# EAGLE board CT_schematic (EAGLE 7.6.0)

Size 100 x 80 mm. Coordinates in mm from the lower left corner, seen from the top.
Outline: 0,0 100,0 100,80 0,80 0,0
Copper layers (1*16): Top 0.035mm / dielectric 1.5mm / Bottom 0.035mm
Design rules "default": minimum track width 10mil, minimum drill 24mil, track to track 8mil, track to pad 8mil, pad to pad 8mil, via to via 8mil, smd to smd 8mil, copper to edge 40mil, drill to drill 8mil, minimum pad ring 10mil, minimum via ring 8mil, stop-mask expansion 4mil, vias tented up to drill 0mil, thermal gap 10mil

## Footprints (pad centres in the part's own frame; a part is rotated, then mirrored left to right if it is on the bottom)
C0603 = smd 0.8 x 0.8: 1 -0.762,0; 2 0.762,0
C0402 = smd 0.5 x 0.5: 1 -0.508,0; 2 0.508,0
C0805 = smd 1.2 x 1.3: 1 -1.016,0; 2 1.016,0
C1206 = smd 1.3 x 1.6: 1 -1.524,0; 2 1.524,0
C1210 = smd 1.2 x 2.5: 1 -1.524,0; 2 1.524,0
EXV-9H = smd 3.505 x 1.676: 1 -2.857,0; 2 2.857,0
L0603 = smd 0.8 x 0.8: 1 -0.762,0; 2 0.762,0
PJ-037B_PACKAGE = drill 3.7 square: 1 12,0 | drill 3.2 square: 2 6,0
R0603 = smd 0.8 x 0.8: 1 -0.762,0; 2 0.762,0
UFQFPN48 = smd 0.559 x 0.305: 1 -3.375,2.751; 2 -3.375,2.251; 3 -3.375,1.75; 4 -3.375,1.25; 5 -3.375,0.75; 6 -3.375,0.25; 7 -3.375,-0.25; 8 -3.375,-0.75; 9 -3.375,-1.25; 10 -3.375,-1.75; 11 -3.375,-2.251; 12 -3.375,-2.751; 25 3.375,-2.751; 26 3.375,-2.251; 27 3.375,-1.75; 28 3.375,-1.25; 29 3.375,-0.75; 30 3.375,-0.25; 31 3.375,0.25; 32 3.375,0.75; 33 3.375,1.25; 34 3.375,1.75; 35 3.375,2.251; 36 3.375,2.751 | smd 0.305 x 0.559: 13 -2.751,-3.375; 14 -2.251,-3.375; 15 -1.75,-3.375; 16 -1.25,-3.375; 17 -0.75,-3.375; 18 -0.25,-3.375; 19 0.25,-3.375; 20 0.75,-3.375; 21 1.25,-3.375; 22 1.75,-3.375; 23 2.251,-3.375; 24 2.751,-3.375; 37 2.751,3.375; 38 2.251,3.375; 39 1.75,3.375; 40 1.25,3.375; 41 0.75,3.375; 42 0.25,3.375; 43 -0.25,3.375; 44 -0.75,3.375; 45 -1.25,3.375; 46 -1.75,3.375; 47 -2.251,3.375; 48 -2.751,3.375 | smd 5.588 x 5.588: 49 0,0
SOIC-8 = smd 1.6 x 0.6: 1 -2.7,1.905 | smd 1.55 x 0.6: 2 -2.7,0.635; 3 -2.7,-0.635; 4 -2.7,-1.905; 5 2.7,-1.905; 6 2.7,-0.635; 7 2.7,0.635; 8 2.7,1.905
SSOP-28 = smd 1.5 x 0.4: 1 -3.625,4.225; 2 -3.625,3.575; 3 -3.625,2.925; 4 -3.625,2.275; 5 -3.625,1.625; 6 -3.625,0.975; 7 -3.625,0.325; 8 -3.625,-0.325; 9 -3.625,-0.975; 10 -3.625,-1.625; 11 -3.625,-2.275; 12 -3.625,-2.925; 13 -3.625,-3.575; 14 -3.625,-4.225; 15 3.625,-4.225; 16 3.625,-3.575; 17 3.625,-2.925; 18 3.625,-2.275; 19 3.625,-1.625; 20 3.625,-0.975; 21 3.625,-0.325; 22 3.625,0.325; 23 3.625,0.975; 24 3.625,1.625; 25 3.625,2.275; 26 3.625,2.925; 27 3.625,3.575; 28 3.625,4.225
FCI_10118193-0001LF = smd 0.4 x 1.35: 1 -1.3,2.675; 2 -0.65,2.675; 3 0,2.675; 4 0.65,2.675; 5 1.3,2.675 | smd 1.6 x 1.4: 6 -3.2,2.45; 7 3.2,2.45 | smd 1.9 x 1.9: 8 -1.2,0; 9 1.2,0 | hole 0.5: -3.3,0; 3.3,0
TDFN-8/6MM = smd 0.3 x 0.75: 1 0,0; 2 0.5,0; 3 1,0; 4 1.5,0; 5 1.5,3; 6 1,3; 7 0.5,3; 8 0,3
ABLS-12.000MHZ-B4-T = smd 5.6 x 2.8: 1 0,0; 2 9.5,0
ASEK = smd 1.4 x 1: 1 -1.1,-0.8; 2 1.1,-0.8; 3 1.1,0.8; 4 -1.1,0.8
ASFL1 = smd 1.7 x 1.5: 1 -1.27,-1.1; 2 1.27,-1.1; 3 1.27,1.1; 4 -1.27,1.1
WSON-8 = smd 0.3 x 0.6: 1 -0.75,0; 2 0.05,0; 3 0.85,0; 4 1.65,0; 5 1.65,3.8; 6 0.85,3.8; 7 0.05,3.8; 8 -0.75,3.8 | smd 3 x 2.6: PAD 0.45,1.9
SON-6 = smd 0.55 x 0.3: 1 -0.355,0.5 | smd 0.52 x 0.3: 2 -0.37,0; 3 -0.37,-0.5; 4 0.37,-0.5; 5 0.37,0; 6 0.37,0.5
SW_4-1437565-2 = smd 1.4 x 2.1: 1 -2.23,4.55; 2 -2.23,-4.55; 3 2.23,4.55; 4 2.23,-4.55
LGM67K-G1J2-24-Z = smd 0.8 x 1.4: A -2,0; C 0,0
NC7SZ125M5X = smd 1.3 x 0.7: 1 -1.3,0.95; 2 -1.3,0; 3 -1.3,-0.95; 4 1.3,-0.95; 5 1.3,0.95

## Placement (x,y rotation side)
C1  1e-06  [C0603]  -33.02,57.15 0 top  (outside the outline)
C2  1e-07  [C0603]  -36.83,57.15 0 top  (outside the outline)
C3  1e-07  [C0603]  -40.64,57.15 0 top  (outside the outline)
C4  1e-07  [C0603]  -44.45,57.15 0 top  (outside the outline)
C5  4.7e-06  [C0603]  -29.21,57.15 0 top  (outside the outline)
C6  1e-07  [C0603]  -48.26,57.15 0 top  (outside the outline)
C7  1e-07  [C0603]  -52.07,57.15 0 top  (outside the outline)
C8  1e-08  [C0603]  -55.88,57.15 0 top  (outside the outline)
C9  1e-06  [C0603]  -59.69,57.15 0 top  (outside the outline)
C10  1e-08  [C0402]  -49.53,62.23 0 top  (outside the outline)
C11  1e-07  [C0402]  -53.34,62.23 0 top  (outside the outline)
C12  4.7e-06  [C0805]  -15.24,52.07 0 top  (outside the outline)
C13  1e-07  [C0402]  -57.15,62.23 0 top  (outside the outline)
C14  1e-07  [C0402]  -60.96,62.23 0 top  (outside the outline)
C15  1e-08  [C0402]  -64.77,62.23 0 top  (outside the outline)
C16  1e-08  [C0402]  -15.24,67.31 0 top  (outside the outline)
C17  1e-08  [C0402]  -19.05,67.31 0 top  (outside the outline)
C18  1e-08  [C0402]  -22.86,67.31 0 top  (outside the outline)
C19  1e-05  [C1206]  -54.61,44.45 0 top  (outside the outline)
C20  1e-05  [C1210]  -48.26,45.72 0 top  (outside the outline)
C21  1e-07  [C0402]  -26.67,67.31 0 top  (outside the outline)
C22  0.0001  [EXV-9H]  -38.1,38.1 0 top  (outside the outline)
C23  0.0001  [EXV-9H]  -49.53,38.1 0 top  (outside the outline)
C24  1e-08  [C0402]  -30.48,67.31 0 top  (outside the outline)
F1  240.0  [L0603]  -63.5,57.15 0 top  (outside the outline)
J1  PJ-037B  [PJ-037B_PACKAGE]  -40.64,7.62 0 top  (outside the outline)
R1  10000.0  [R0603]  -35.56,52.07 0 top  (outside the outline)
R2  1000.0  [R0603]  -15.24,62.23 0 top  (outside the outline)
R3  1600.5  [R0603]  -19.05,62.23 0 top  (outside the outline)
R4  4700.0  [R0603]  -22.86,62.23 0 top  (outside the outline)
R5  2200.0  [R0603]  -26.67,62.23 0 top  (outside the outline)
R6  2200.0  [R0603]  -30.48,62.23 0 top  (outside the outline)
R7  10000.0  [R0603]  -40.64,52.07 0 top  (outside the outline)
R8  10000.0  [R0603]  -45.72,52.07 0 top  (outside the outline)
R9  10000.0  [R0603]  -50.8,52.07 0 top  (outside the outline)
R10  10000.0  [R0603]  -55.88,52.07 0 top  (outside the outline)
R11  4700.0  [R0603]  -34.29,62.23 0 top  (outside the outline)
R12  10000.0  [R0603]  -60.96,52.07 0 top  (outside the outline)
R13  10000.0  [R0603]  -15.24,57.15 0 top  (outside the outline)
R14  100000.0  [R0603]  -20.32,52.07 0 top  (outside the outline)
R15  2231.0  [R0603]  -38.1,62.23 0 top  (outside the outline)
R16  1000.0  [R0603]  -41.91,62.23 0 top  (outside the outline)
R17  10000.0  [R0603]  -20.32,57.15 0 top  (outside the outline)
R18  10000.0  [R0603]  -25.4,57.15 0 top  (outside the outline)
R19  9100.0  [R0603]  -45.72,62.23 0 top  (outside the outline)
R20  680000.0  [R0603]  -25.4,52.07 0 top  (outside the outline)
R21  120000.0  [R0603]  -30.48,52.07 0 top  (outside the outline)
U1  stm32f091ccu7  [UFQFPN48]  -17.78,29.21 0 top  (outside the outline)
U2  AT25M02-SSHD-T  [SOIC-8]  -39.37,20.32 0 top  (outside the outline)
U3  FT232RL-REEL  [SSOP-28]  -20.32,7.62 0 top  (outside the outline)
U4  10118193-0001LF  [FCI_10118193-0001LF]  -45.72,29.21 0 top  (outside the outline)
U5  24AA01T-I/MNY  [TDFN-8/6MM]  -24.13,19.05 0 top  (outside the outline)
U6  ABLS-12.000MHZ-B4-T  [ABLS-12.000MHZ-B4-T]  -29.21,45.72 0 top  (outside the outline)
U7  ASEK-32.768KHz-ECST  [ASEK]  -29.21,38.1 0 top  (outside the outline)
U8  ASFL1-25MHZ-NCS  [ASFL1]  -36.83,29.21 0 top  (outside the outline)
U9  LP3878SDX-ADJ/NOPB  [WSON-8]  -60.96,17.78 0 top  (outside the outline)
U10  TPS3895ADRYR  [SON-6]  -33.02,66.04 0 top  (outside the outline)
U11  4-1437565-2  [SW_4-1437565-2]  -57.15,6.35 0 top  (outside the outline)
U12  Q65110A2395  [LGM67K-G1J2-24-Z]  -36.83,45.72 0 top  (outside the outline)
U13  nc7sz125m5x  [NC7SZ125M5X]  -59.69,44.45 0 top  (outside the outline)

## Library data of the parts
C1-C24 F1 J1 R1-R21 U1-U13 = circuit_tree

## Nets
CLK_CRYSTAL_U3_27: U3.27 U6.1
CLK_CRYSTAL_U3_28: U3.28 U6.2
CLK_U1_3: U1.3 U7.3
CLK_U1_5: U1.5 U8.3
GND: C1.2 C2.2 C3.2 C4.2 C5.2 C6.2 C7.2 C8.2 C9.2 C10.2 C11.2 C12.2 C13.2 C14.2 C15.2 C16.2 C17.2 C18.2 C19.2 C20.2 C21.2 C22.2 C23.2 C24.2 J1.2 R2.2 R7.2 R13.2 R16.2 R19.2 R21.2 U1.8 U1.23 U1.35 U1.47 U1.49 U2.4 U3.7 U3.18 U3.21 U3.25 U3.26 U4.5 U4.6 U4.7 U4.8 U4.9 U5.4 U5.7 U7.2 U8.2 U9.3 U9.PAD U10.2 U12.C U13.1 U13.3
NET_U1_6: R5.1 U1.6 U5.6
NET_U1_7: R4.1 U1.7 U13.4
NET_U1_9: C8.1 C9.1 F1.1 U1.9
NET_U1_43: R6.1 U1.43 U5.5
NET_U1_44: R7.1 U1.44
NET_U1_45: R3.1 U1.45 U12.A
NET_U1_46: R1.1 U1.46 U11.3 U11.4
NET_U2_3: R8.1 U2.3
NET_U2_7: R10.1 U2.7
NET_U3_14: R12.1 U3.14
NET_U3_17: C13.1 U3.17
NET_U3_19: R13.1 U3.19
NET_U4_1: R11.1 U4.1
NET_U4_2: U3.16 U4.2
NET_U4_3: U3.15 U4.3
NET_U4_19: R11.2
NET_U9_1: C18.1 U9.1
NET_U9_6: R15.2 R16.1 U9.6
NET_U9_8: R14.1 U9.8
NET_U10_1: R18.1 R19.1 U10.1
NET_U10_3: R20.2 R21.1 U10.3
NET_U10_4: R17.1 U10.4 U13.2
NET_U11_1: R2.1 U11.1 U11.2
PROC_SPI1_MISO: U1.16 U2.2
PROC_SPI1_MOSI: U1.17 U2.5
PROC_SPI1_NSS: R9.1 U1.14 U2.1
PROC_SPI1_SCK: U1.15 U2.6
PROC_USART1_CTS: U1.32 U3.3
PROC_USART1_RTS: U1.33 U3.11
PROC_USART1_RX: U1.31 U3.1
PROC_USART1_TX: U1.30 U3.5
VCC_S1_5V9: C19.1 C22.1 C23.1 J1.1 R14.2 U9.4
VCC_TIER1_3V3: C1.1 C2.1 C3.1 C4.1 C5.1 C6.1 C7.1 C10.1 C11.1 C12.1 C14.1 C15.1 C16.1 C17.1 C20.1 C21.1 C24.1 F1.2 R1.2 R3.2 R4.2 R5.2 R6.2 R8.2 R9.2 R10.2 R12.2 R15.1 R17.2 R18.2 R20.1 U1.1 U1.24 U1.36 U1.48 U2.8 U3.4 U3.20 U5.8 U7.4 U8.4 U9.5 U10.6 U13.5

## Tracks (layer width: path | path; a pad name or v marks a point on that pad's centre or on a via)
CLK_CRYSTAL_U3_27  (1 unrouted)
CLK_CRYSTAL_U3_28  (1 unrouted)
CLK_U1_3  (1 unrouted)
CLK_U1_5  (1 unrouted)
GND  (56 unrouted)
NET_U1_6  (2 unrouted)
NET_U1_7  (2 unrouted)
NET_U1_9  (3 unrouted)
NET_U1_43  (2 unrouted)
NET_U1_44  (1 unrouted)
NET_U1_45  (2 unrouted)
NET_U1_46  (3 unrouted)
NET_U2_3  (1 unrouted)
NET_U2_7  (1 unrouted)
NET_U3_14  (1 unrouted)
NET_U3_17  (1 unrouted)
NET_U3_19  (1 unrouted)
NET_U4_1  (1 unrouted)
NET_U4_2  (1 unrouted)
NET_U4_3  (1 unrouted)
NET_U9_1  (1 unrouted)
NET_U9_6  (2 unrouted)
NET_U9_8  (1 unrouted)
NET_U10_1  (2 unrouted)
NET_U10_3  (2 unrouted)
NET_U10_4  (2 unrouted)
NET_U11_1  (2 unrouted)
PROC_SPI1_MISO  (1 unrouted)
PROC_SPI1_MOSI  (1 unrouted)
PROC_SPI1_NSS  (2 unrouted)
PROC_SPI1_SCK  (1 unrouted)
PROC_USART1_CTS  (1 unrouted)
PROC_USART1_RTS  (1 unrouted)
PROC_USART1_RX  (1 unrouted)
PROC_USART1_TX  (1 unrouted)
VCC_S1_5V9  (5 unrouted)
VCC_TIER1_3V3  (43 unrouted)